# EAGLE board 40m_FT8_BD6CR (EAGLE 9.2.2)
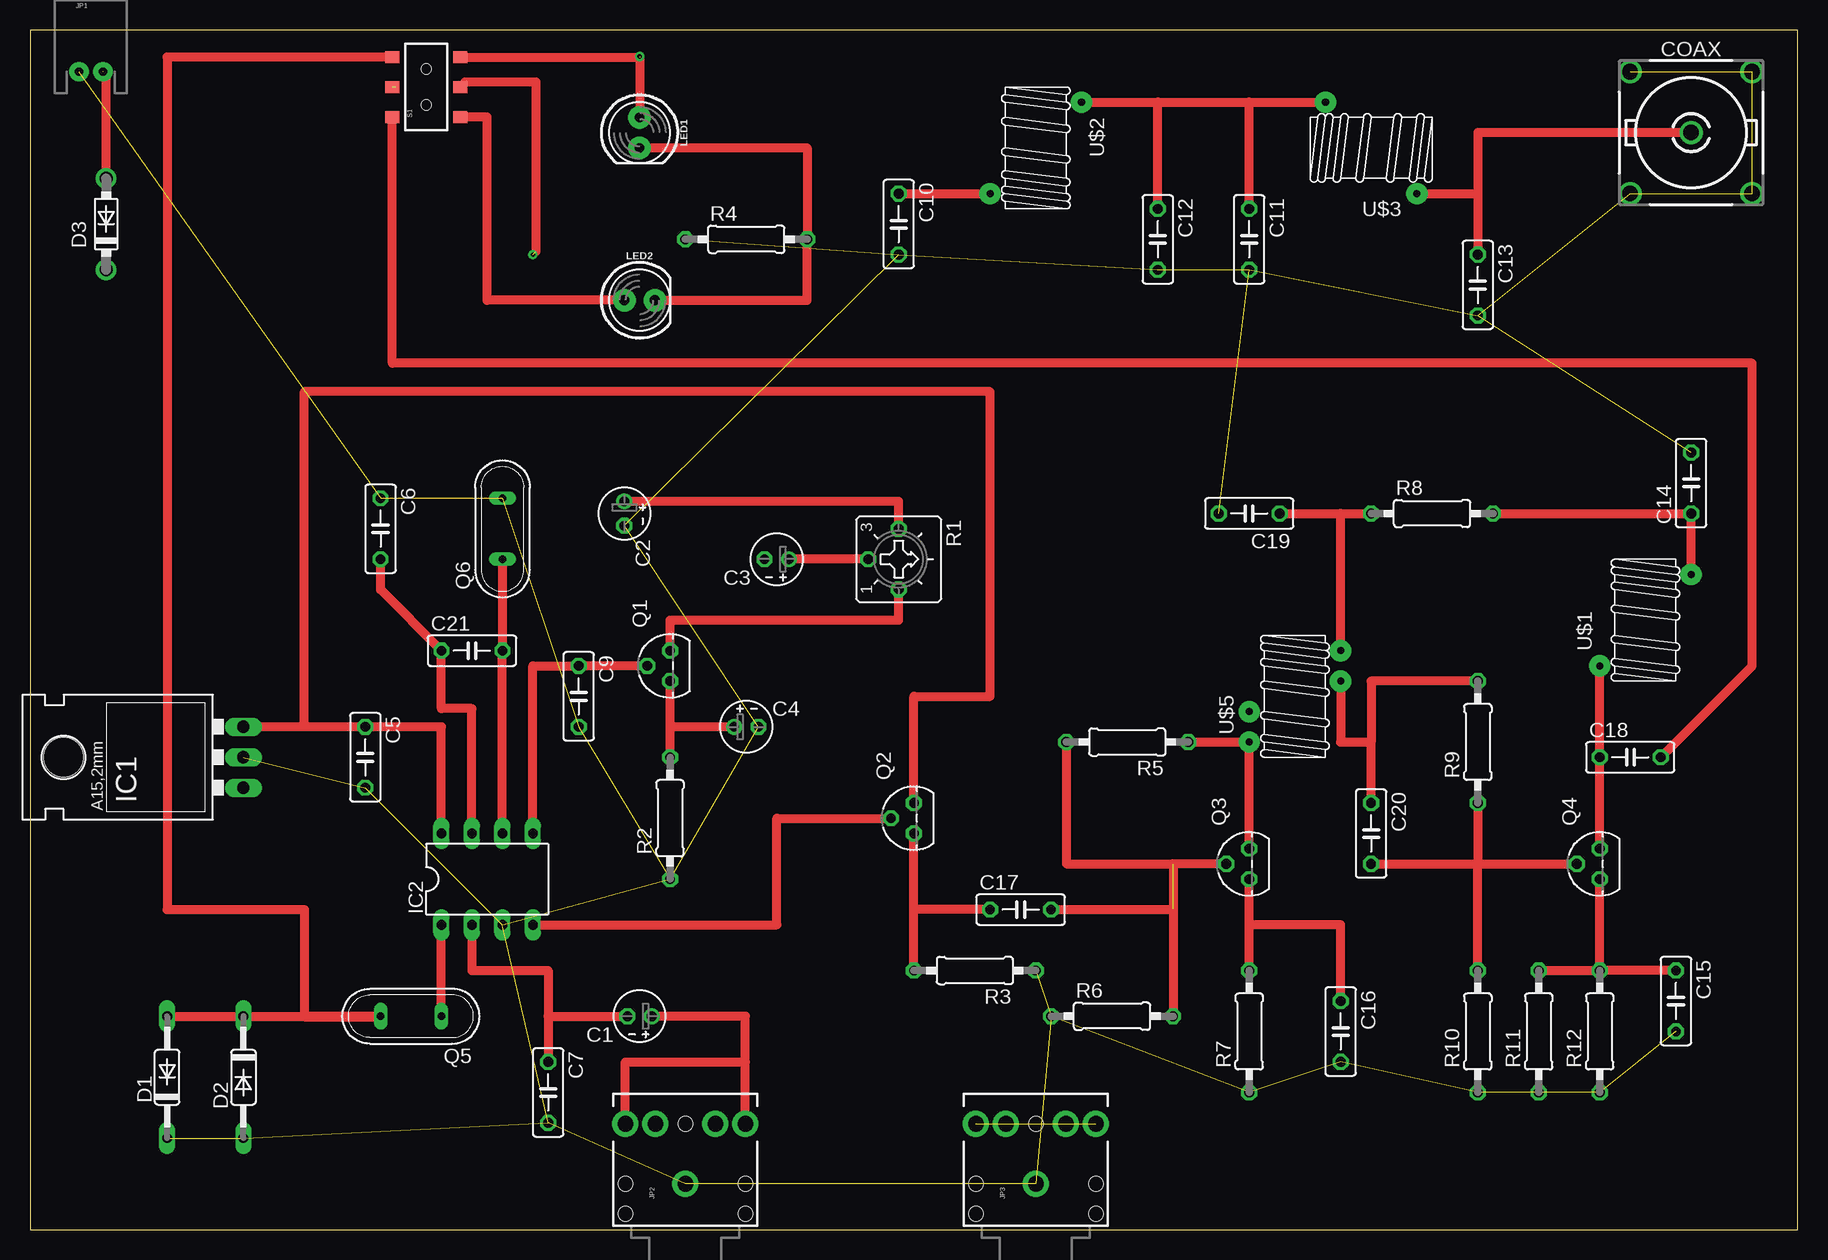
[diagram p0: board, top side]
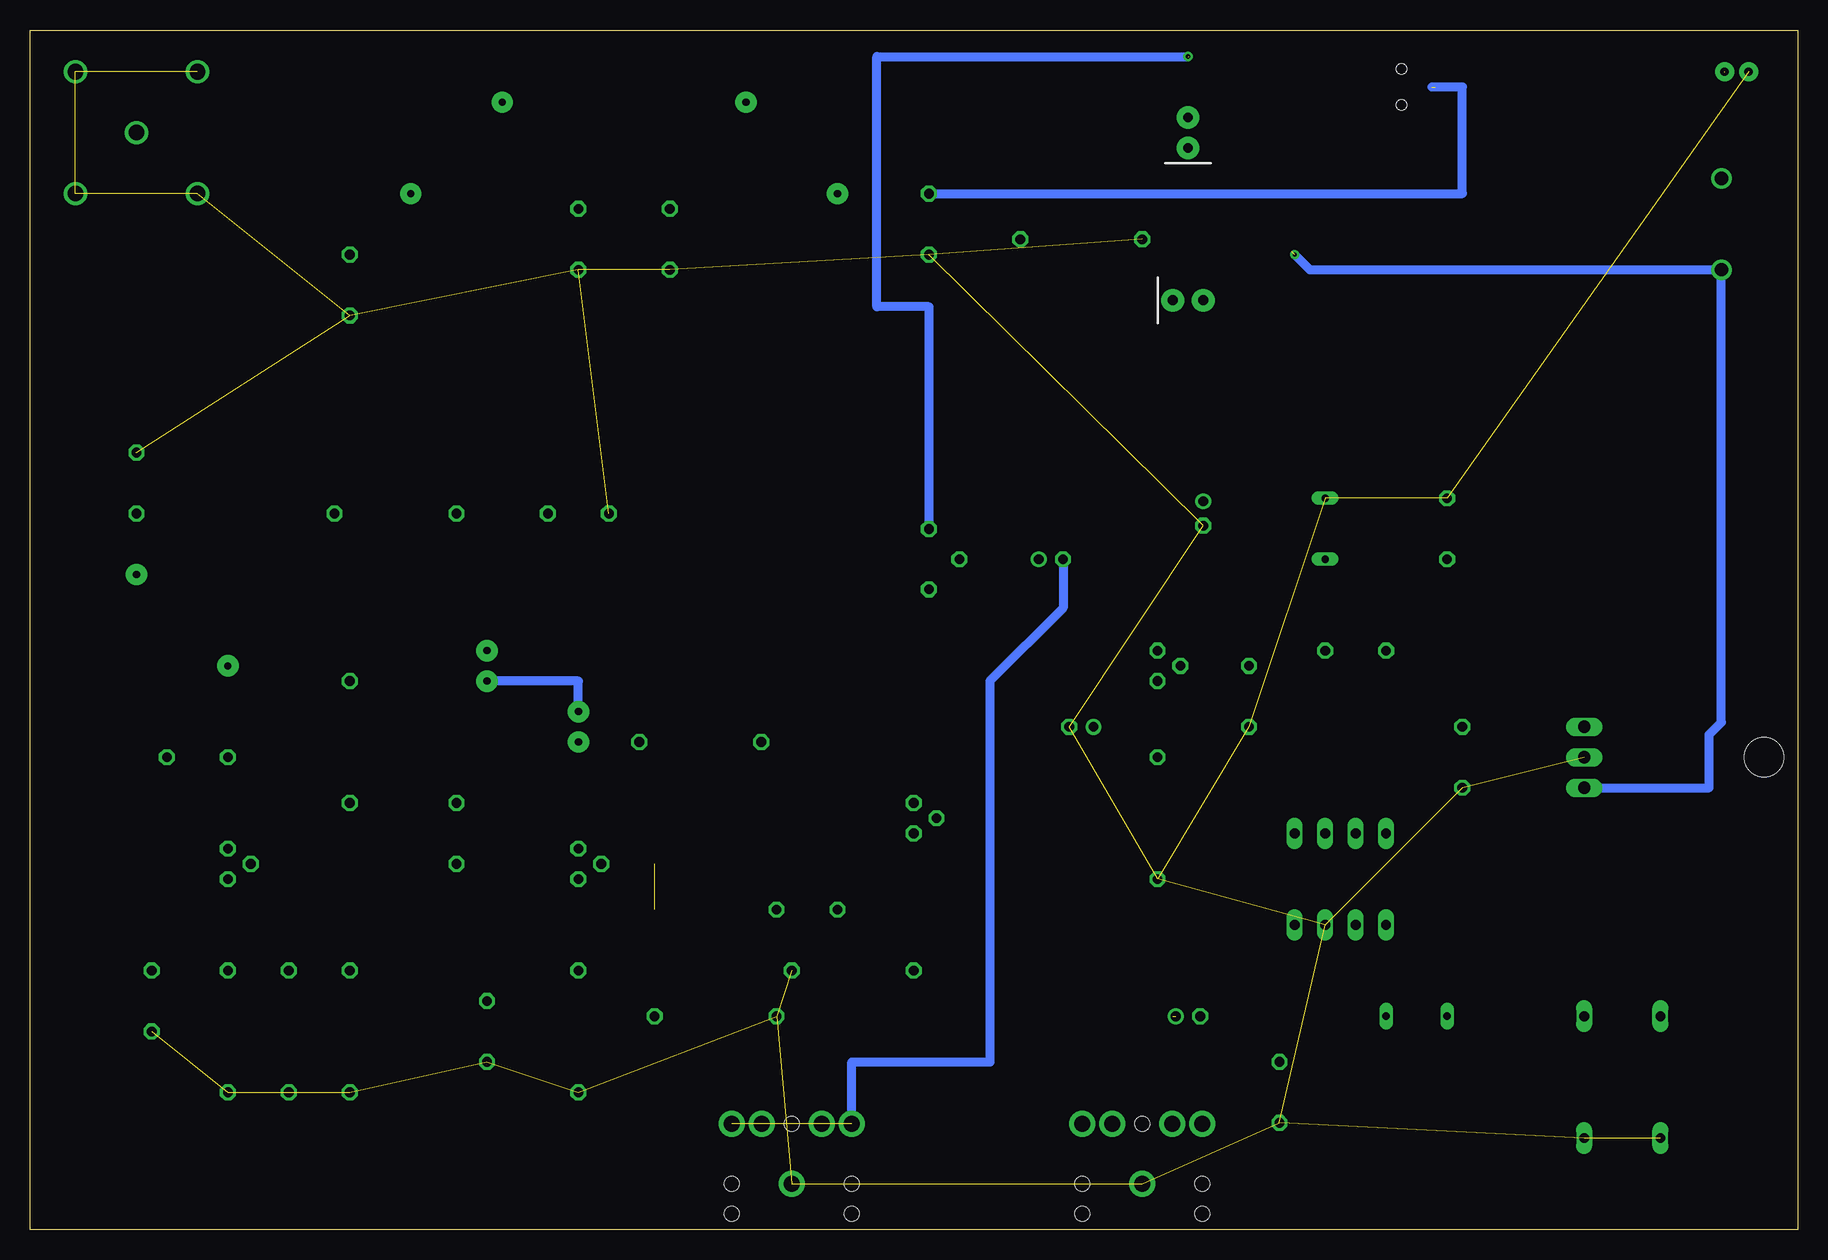
[diagram p1: board, bottom side, seen from below]

Size 147.3 x 100 mm. Coordinates in mm from the lower left corner, seen from the top.
Outline: 0,0 147.3,0 147.3,100 0,100 0,0
Copper layers (1*16): Top 0.035mm / dielectric 1.5mm / Bottom 0.035mm
Design rules "default": minimum track width 6mil, minimum drill 0.35mm, track to track 6mil, track to pad 6mil, pad to pad 6mil, via to via 6mil, smd to smd 6mil, copper to edge 40mil, drill to drill 6mil, minimum pad ring 10mil, minimum via ring 8mil, stop-mask expansion 4mil, vias tented up to drill 0mil, thermal gap 10mil
Net classes: 0 default: width 0.762 mm, clearance 0.762 mm; 1 Jim: width 0.914 mm, clearance 0.914 mm

## Footprints (pad centres in the part's own frame; a part is rotated, then mirrored left to right if it is on the bottom)
E2-4 = drill 0.813 pad 1.27: + -1.016,0 | drill 0.813 pad 1.27 octagon: - 1.016,0
C050-025X075 = drill 0.813 octagon: 1 -2.54,0; 2 2.54,0
R141426 = drill 1.295: 1 0,0; 2 5.08,5.08; 3 -5.08,5.08; 4 -5.08,-5.08; 5 5.08,-5.08
DO35-10 = drill 0.813 long: A 5.08,0; C -5.08,0
DO41-7.6 = drill 1.1 pad 1.7: A 3.81,0; C -3.81,0
78XXL = drill 1.016 long: GND 0,-3.81; IN -2.54,-3.81; OUT 2.54,-3.81 | hole 3.302: 0,11.176
DIL08 = drill 0.813 long: 1 -3.81,-3.81; 2 -1.27,-3.81; 3 1.27,-3.81; 4 3.81,-3.81; 5 3.81,3.81; 6 1.27,3.81; 7 -1.27,3.81; 8 -3.81,3.81
JST-2-PTH-NS = drill 0.7 pad 1.6: 1 -1,0; 2 1,0
AUDIO-JACK = drill 1.3 pad 2.184: RING 5,5; RSH 5,2.5; SLEEVE 0,0; TIP 5,-5; TSH 5,-2.5 | hole 1.2: 0,5; -2.5,5; -2.5,-5; 0,-5; 5,0
LED_5MM = drill 0.813 pad 1.88: A -1.27,0; K 1.27,0
TO92D = drill 0.813 octagon: B 0,1.905; C 1.27,0; E -1.27,0
QS = drill 0.61 long: 1 -2.54,0; 2 2.54,0
CT6 = drill 0.813 octagon: A 2.515,0; E -2.515,0; S 0,-2.54
0207/10 = drill 0.813 octagon: 1 -5.08,0; 2 5.08,0
AYZ0202 = smd 1 x 1.15: 1 -2.5,2.825; 2 0,2.825; 3 2.5,2.825; 4 -2.5,-2.825; 5 0,-2.825; 6 2.5,-2.825 | hole 0.85: 1.5,0; -1.5,0
T37_INDUCTOR = drill 0.6 pad 1.778: CA -3.81,-3.81; CB 3.81,3.81
T37_TRANSFORMER = drill 0.6 pad 1.778: C1A -3.81,-3.81; C1B 3.81,1.27; C2A -3.81,-1.27; C2B 3.81,3.81

## Placement (x,y rotation side)
C1  1uF  [E2-4]  50.8,17.78 180 top
C2  1uF  [E2-4]  49.53,59.69 270 top
C3  1uF  [E2-4]  62.23,55.88 180 top
C4  1uF  [E2-4]  59.69,41.91 0 top
C5  103P  [C050-025X075]  27.94,39.37 270 top
C6  68P  [C050-025X075]  29.21,58.42 270 top
C7  103P  [C050-025X075]  43.18,11.43 270 top
C9  103P  [C050-025X075]  45.72,44.45 270 top
C10  470P  [C050-025X075]  72.39,83.82 270 top
C11  470P  [C050-025X075]  101.6,82.55 270 top
C12  470P  [C050-025X075]  93.98,82.55 270 top
C13  470P  [C050-025X075]  120.65,78.74 270 top
C14  103P?  [C050-025X075]  138.43,62.23 90 top
C15  103P?  [C050-025X075]  137.16,19.05 270 top
C16  103P  [C050-025X075]  109.22,16.51 270 top
C17  68P  [C050-025X075]  82.55,26.67 0 top
C18  103P?  [C050-025X075]  133.35,39.37 0 top
C19  103P?  [C050-025X075]  101.6,59.69 180 top
C20  103P  [C050-025X075]  111.76,33.02 270 top
C21  27P  [C050-025X075]  36.83,48.26 0 top
COAX  50_Ohm  [R141426]  138.43,91.44 0 top
D1  1N4148  [DO35-10]  11.43,12.7 90 top
D2  1N4148  [DO35-10]  17.78,12.7 270 top
D3  1N5817-B  [DO41-7.6]  6.35,83.82 90 top
IC1  LM7805  [78XXL]  13.97,39.37 90 top
IC2  NE602  [DIL08]  38.1,29.21 0 top
JP1  POWER (3S 18650)  [JST-2-PTH-NS]  5.08,96.52 0 top
JP2  [AUDIO-JACK]  54.61,3.81 90 top
JP3  [AUDIO-JACK]  83.82,3.81 90 top
LED1  GRN  [LED_5MM]  50.8,91.44 270 top
LED2  RED  [LED_5MM]  50.8,77.47 0 top
Q1  2N3904  [TO92D]  53.34,46.99 90 top
Q2  2N3904  [TO92D]  73.66,34.29 90 top
Q3  2N3904  [TO92D]  101.6,30.48 90 top
Q4  BD139  [TO92D]  130.81,30.48 90 top
Q5  7074  [QS]  31.75,17.78 180 top
Q6  7074  [QS]  39.37,58.42 90 top
R1  500R  [CT6]  72.39,55.88 270 top
R2  1.5K  [0207/10]  53.34,34.29 90 top
R3  680R  [0207/10]  78.74,21.59 180 top
R4  1.5K  [0207/10]  59.69,82.55 0 top
R5  3.3K  [0207/10]  91.44,40.64 180 top
R6  680R  [0207/10]  90.17,17.78 0 top
R7  22R  [0207/10]  101.6,16.51 90 top
R8  22R  [0207/10]  116.84,59.69 0 top
R9  3K3  [0207/10]  120.65,40.64 90 top
R10  220R  [0207/10]  120.65,16.51 90 top
R11  10R  [0207/10]  125.73,16.51 90 top
R12  10R  [0207/10]  130.81,16.51 90 top
S1  DPDT Latching PCB Mount  [AYZ0202]  33.02,95.25 90 top
U$1  10uH  [T37_INDUCTOR]  134.62,50.8 0 top
U$2  T37-2 16T  [T37_INDUCTOR]  83.82,90.17 180 top
U$3  T37_INDUCTOR_FLAT  [T37_INDUCTOR]  111.76,90.17 90 top
U$5  FT37-43 BIFILAR 8T  [T37_TRANSFORMER]  105.41,44.45 0 top

## Library data of the parts
C1-C7 C9-C21 = rcl; SPICEPREFIX: C
COAX = con-coax; MF: FARNELL; MPN: R141426161; OC_FARNELL: 4195115; OC_NEWARK: 14J7919
D1-D3 = diode
IC1 = SparkFun-PowerIC
IC2 = ic-package
JP1-JP3 = SparkFun-Connectors
LED1 LED2 = SparkFun-LED
Q1-Q4 = transistor-small-signal
Q5 Q6 = special
R1 = pot
R2-R12 = rcl; SPICEPREFIX: R
S1 = SparkFun-Electromechanical; PROD_ID: SWCH-08179
U$1 = toroid; 10UH: 10UH
U$2 U$3 = toroid; T37-2_16T: T37-2 16T
U$5 = toroid

## Nets
12V: D3.C IC1.IN S1.5
12V_R: C2.+ LED1.A R1.E S1.6
12V_T: LED2.A S1.4
GND: C2.- C4.- C5.2 C6.1 C7.2 C9.2 C10.2 C11.2 C12.2 C13.2 C14.2 C15.2 C16.2 C19.2 COAX.2 COAX.3 COAX.4 COAX.5 D1.C D2.A IC1.GND IC2.3 JP1.1 JP2.SLEEVE JP3.SLEEVE Q6.2 R2.1 R3.1 R4.1 R6.1 R7.1 R10.1 R11.1 R12.1
N$1: C3.+ R1.S
N$2: C5.1 IC1.OUT IC2.8 Q2.C
N$3: C13.1 COAX.1 U$3.CA
N$4: C11.1 C12.1 U$2.CA U$3.CB
N$5: C10.1 S1.2 U$2.CB
N$6: D3.A JP1.2
N$7: C3.- JP3.RING JP3.TIP
N$9: C18.1 Q4.C U$1.CA
N$10: C14.1 R8.2 U$1.CB
N$11: C19.1 R8.1 U$5.C2B
N$13: C20.1 R9.2 U$5.C1B U$5.C2A
N$14: C20.2 Q4.B R9.1 R10.2
N$15: LED1.K LED2.K R4.2
N$16: Q3.C R5.1 U$5.C1A
N$17: C17.2 Q3.B R5.2 R6.2
N$18: C16.1 Q3.E R7.2
N$19: C17.1 Q2.E R3.2
N$21: C9.1 IC2.5 Q1.B
N$22: Q1.C R1.A
N$23: IC2.1 Q5.1
N$24: C6.2 C21.1 IC2.7
N$25: C21.2 IC2.6 Q6.1
N$26: D1.A D2.C Q5.2 S1.3
N$27: C1.+ JP2.RING JP2.TIP
N$28: C1.- C7.1 IC2.2
N$29: C4.+ Q1.E R2.2
N$30: IC2.4 Q2.B
N$31: C18.2 S1.1
N$33: C15.1 Q4.E R11.2 R12.2

## Tracks (layer width: path | path; a pad name or v marks a point on that pad's centre or on a via)
12V  (via drill 0.35)  (1 unrouted)
  Top 0.762: S1.5 36.26,95.66 42.16,95.66 42.16,81.53
  Bottom 0.762: v41.91,81.28 40.64,80.01 D3.C 6.35,42.28 7.37,41.26 7.37,36.83 IC1.IN
12V_R  (via drill 0.35)  (1 unrouted)
  Top 0.762: R1.E 72.39,60.71 C2.+ | S1.6 50.8,97.75 LED1.A
  Bottom 0.762: v50.8,97.79 76.73,97.79 76.73,76.94 72.39,76.94 R1.E
12V_T
  Top 0.762: LED2.A 38.1,77.47 38.1,92.75 S1.4
GND  (33 unrouted)
N$1
  Top 0.762: R1.S C3.+
N$2
  Top 0.762: 22.86,41.91 C5.1 34.29,41.91 IC2.8 | 22.86,41.91 IC1.OUT | 22.86,41.91 22.86,69.85 80.01,69.85 80.01,44.45 73.66,44.45 Q2.C
N$3
  Top 0.762: COAX.1 120.65,91.44 120.65,86.36 | 120.65,86.36 C13.1 | U$3.CA 120.65,86.36
N$4
  Top 0.762: U$2.CA 93.98,93.98 | 93.98,93.98 101.6,93.98 | 101.6,93.98 U$3.CB | C12.1 93.98,93.98 | C11.1 101.6,93.98
N$5  (1 unrouted)
  Top 0.762: C10.1 U$2.CB
  Bottom 0.762: C10.1 27.94,86.36 27.94,95.25 30.48,95.25
N$6  (1 unrouted)
  Top 0.762: D3.A 6.35,96.52 6.12,96.52
N$7  (1 unrouted)
  Bottom 0.762: JP3.RING 78.82,13.97 67.31,13.97 67.31,45.72 61.21,51.82 C3.-
N$9
  Top 0.762: Q4.C C18.1 U$1.CA
N$10
  Top 0.762: U$1.CB C14.1 R8.2
N$11
  Top 0.762: C19.1 109.22,59.69 | 109.22,59.69 R8.1 | U$5.C2B 109.22,59.69
N$13
  Top 0.762: C20.1 111.76,40.64 | 111.76,40.64 111.76,45.72 R9.2 | U$5.C1B 109.22,40.64 111.76,40.64
  Bottom 0.762: U$5.C2A 101.6,45.72 U$5.C1B
N$14
  Top 0.762: C20.2 120.65,30.48 | 120.65,30.48 Q4.B | R9.1 120.65,30.48 | R10.2 120.65,30.48
N$15
  Top 0.762: LED2.K 64.77,77.47 R4.2 64.77,90.17 | LED1.K 64.77,90.17 | 64.77,90.17
N$16
  Top 0.762: Q3.C U$5.C1A R5.1
N$17  (1 unrouted)
  Top 0.762: C17.2 95.25,26.67 | 95.25,30.48 R6.2 | Q3.B 95.25,30.48 | 95.25,30.48 86.36,30.48 R5.2
N$18
  Top 0.762: R7.2 101.6,25.4 | 101.6,25.4 Q3.E | C16.1 109.22,25.4 101.6,25.4
N$19
  Top 0.762: R3.2 73.66,26.67 | 73.66,26.67 Q2.E | C17.1 73.66,26.67
N$21
  Top 0.762: IC2.5 41.91,46.99 C9.1 Q1.B
N$22
  Top 0.762: Q1.C 53.34,50.8 72.39,50.8 R1.A
N$23
  Top 0.762: Q5.1 IC2.1
N$24
  Top 0.762: IC2.7 36.83,43.43 34.29,43.43 C21.1 29.21,53.34 C6.2
N$25
  Top 0.762: IC2.6 C21.2 Q6.1
N$26
  Top 0.762: D1.A D2.C 22.86,17.78 22.86,26.67 11.43,26.67 11.43,97.75 S1.3
  Top 0.813: 22.86,17.78 Q5.2
N$27  (1 unrouted)
  Top 0.762: JP2.TIP 59.61,13.97 | 59.61,13.97 59.61,17.78 52.07,17.78 | JP2.RING 49.61,13.97 59.61,13.97
N$28
  Top 0.152: C7.1 43.18,17.78
  Top 0.762: C7.1 43.18,21.59 36.83,21.59 IC2.2 | 43.18,17.78 C1.-
N$29
  Top 0.762: R2.2 53.34,41.91 | 53.34,41.91 Q1.E | C4.+ 53.34,41.91
N$30
  Top 0.762: IC2.4 62.23,25.4 62.23,34.29 Q2.B
N$31
  Top 0.762: S1.1 30.2,72.23 143.51,72.23 143.51,46.99 C18.2
N$33
  Top 0.762: R12.2 Q4.E | R11.2 R12.2 | C15.1 R12.2